# Altium PCB MRF49XAmboard.OLD.PcbDoc
Units mm, origin at the board's own origin, x right, y up, seen from the top; angles counter-clockwise.
Board outline 20.81 x 30 mm, 2 copper layers (Top Layer, Bottom Layer); 14 components, 18 nets, 48 pads, 55 vias.
Unrouted connection lines stored in the file: 2.
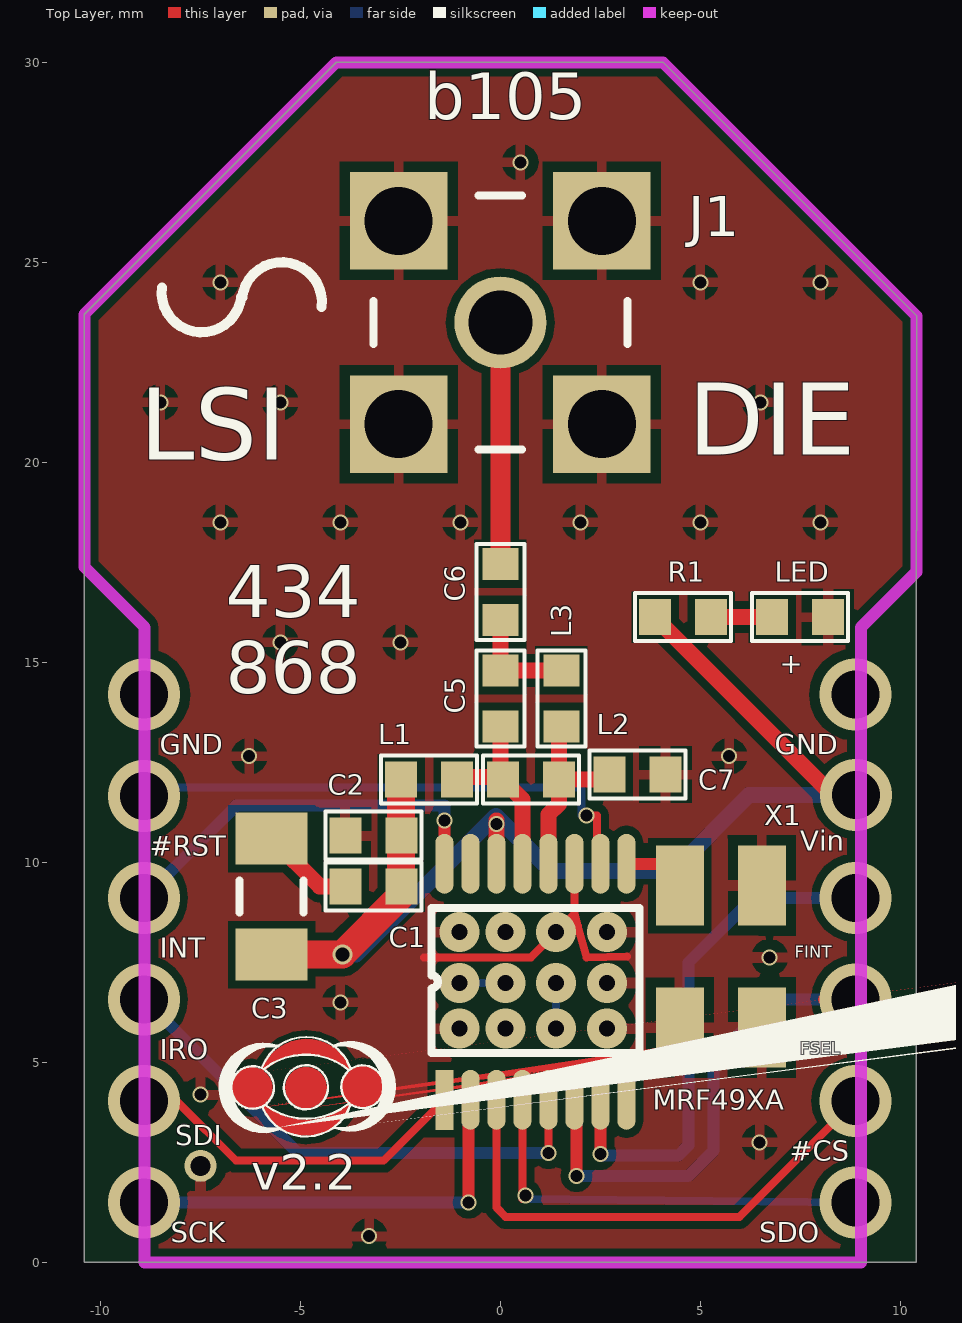
[diagram p0: Top Layer view]
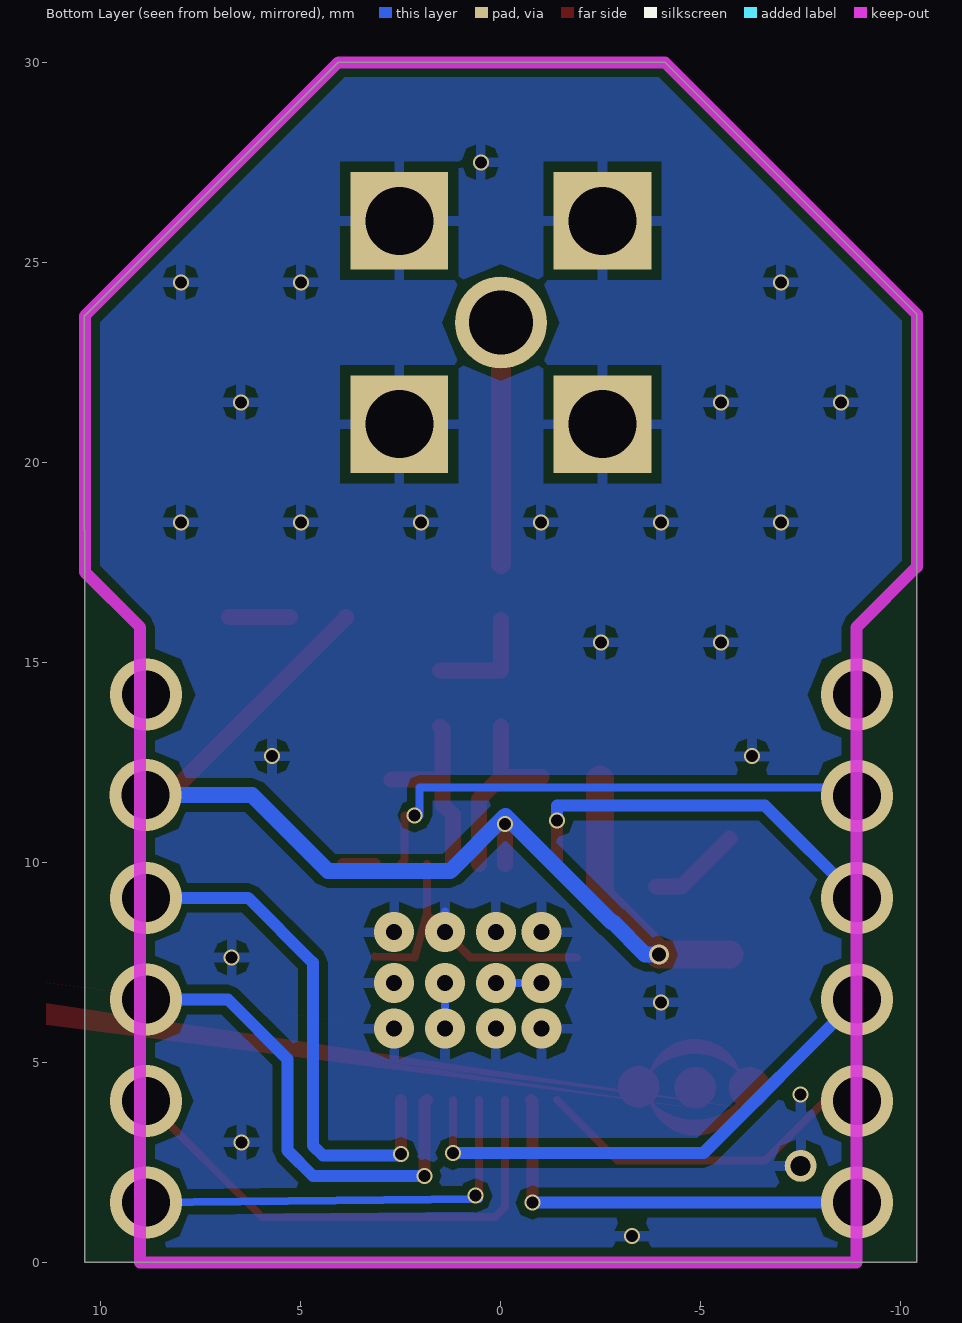
[diagram p1: Bottom Layer view, seen from below]
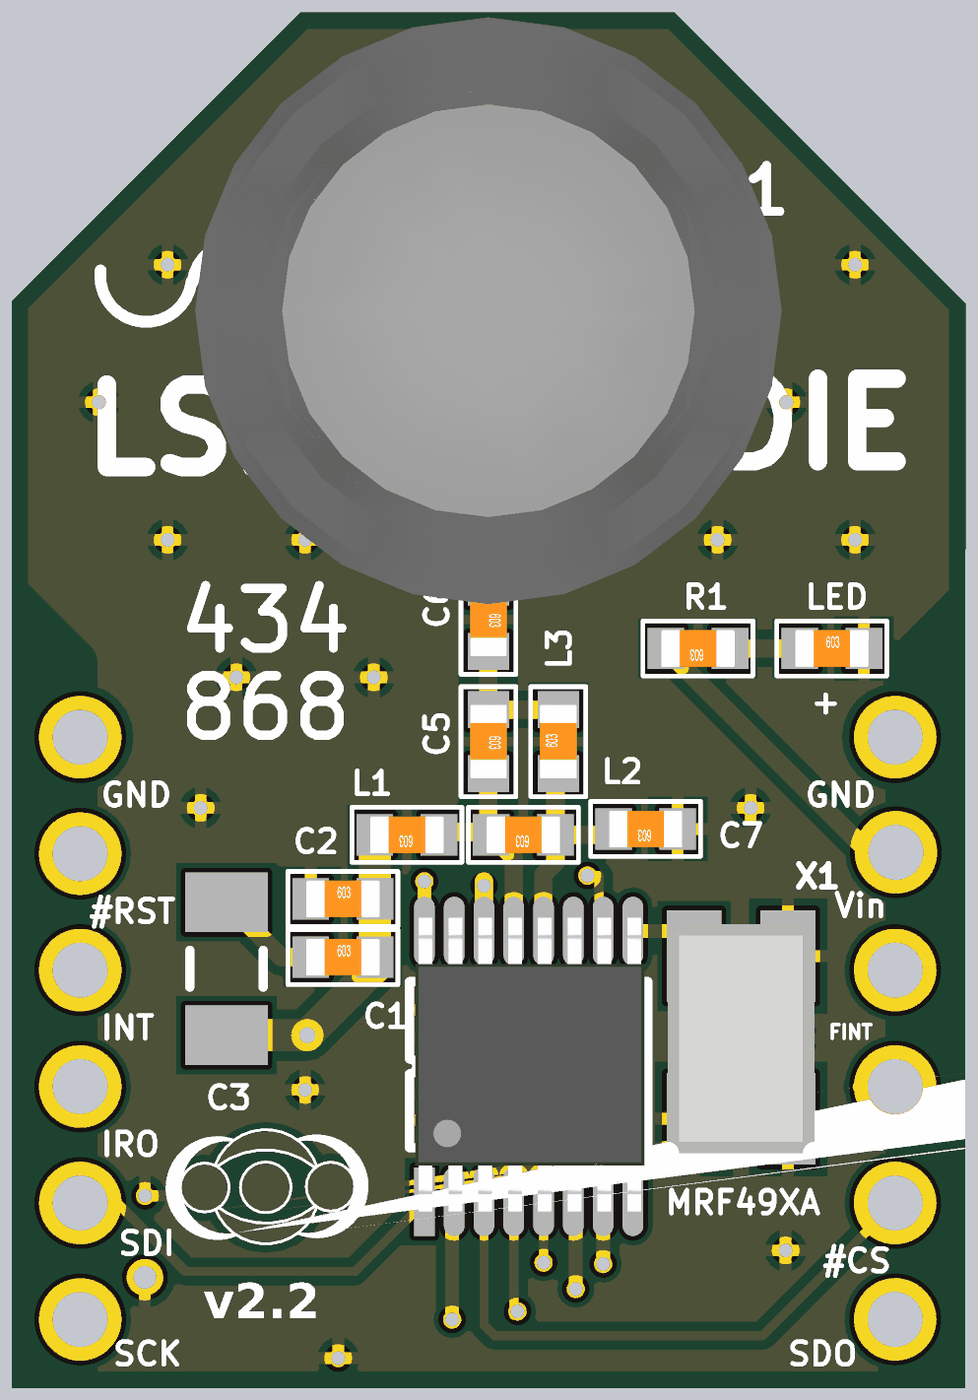
[diagram p2: 3D render of the assembled board from above, using the file's embedded part models]

## Layer stack, top to bottom
Top Solder: solder mask 0.0102, Solder Resist, Dk 3.5
Top Layer: signal copper 0.0356
Dielectric1: dielectric 0.32, FR-4, Dk 4.8
Bottom Layer: signal copper 0.0356
Bottom Solder: solder mask 0.0102, Solder Resist, Dk 3.5

## Board outline
-10.4,0 -10.4,23.7 -4.1,30 4.064,30 10.414,23.65 10.414,18.288 10.4,18.302 10.4,0

## Design rules (kind name [scope] priority, off if disabled: settings)
Clearance [All] p1: gap=0.2
Height [All] p1: minheight=0 maxheight=100 prefheight=12.7
HoleSize [All] p1: absolutevalues=TRUE maxlimit=1.7 minlimit=0.3 maxpercent=80.000 minpercent=20.000
MinimumAnnularRing [All] p1: minimumring=0.05
MinimumSolderMaskSliver [All] p1: minsoldermaskwidth=0.06
PolygonConnect [All] p1: connectstyle=Relief reliefconductorwidth=0.254 reliefentries=4 polygonreliefangle="90 Angle" airgapwidth=0.254
RoutingVias [All] p1: holewidth=0.4 width=1 viastyle="Through Hole" minholewidth=0.15 minwidth=0.4 maxholewidth=1.2 maxwidth=1.9
SilkToSilkClearance [All] p1: silktosilkclearance=0.15
SilkToSolderMaskClearance SilkscreenOverComponentPads [IsPad] p1: minsilkscreentomaskgap=0.04 clearancetoexposedcopper=TRUE
SolderMaskExpansion [All] p1: expansion=0.102
UnpouredPolygon [All] p1: allowunpoured=FALSE
Width Width_VCC [InNet('VCC')] p1: maxlimit=1 minlimit=0.3 preferedwidth=0.4 minimp=50.000000 maximp=50.000000 favimp=50.000000
Width [All] p2: maxlimit=1 minlimit=0.2 preferedwidth=0.2 minimp=50.000000 maximp=50.000000 favimp=50.000000
24 further rules are at their usual default settings.

## Components (designator, comment, footprint, x,y, rotation, side; value= is the part's Value field where it differs from the comment)
C1 "Cap" "1608[0603] - SERIGRAFIADO" -3.175,9.398 r0 top
C2 "Cap" "1608[0603] - Serigrafiado" -3.175,10.668 r0 top
C3 "Cap" CAPC3216N -5.715,9.144 r270 top
C5 "Cap" "1608[0603] - serigrafiado" 0,14.097 r270 top
C6 "Cap" "1608[0603] - serigrafiado" 0,16.764 r270 top
C7 "Cap" "1608[0603] - serigrafiado" 3.429,12.192 r180 top
J1 "SMA 50OHM PCB launcher" "SMA PCB LAUNCHER" 0,23.495 r90 top
L1 "L" "1608[0603] - serigrafiado" -1.778,12.065 r180 top
L2 "L" "1608[0603] - serigrafiado" 0.762,12.065 r180 top
L3 "L" "1608[0603] - serigrafiado" 1.524,14.097 r90 top
LED "LED_SMD_Hg" "1608[0603] - SERIGRAFIADO" 7.493,16.129 r0 top
MRF49XA "MRF49XA" MRF49XA -1.397,4.064 r90 top
R1 "Res1" "1608[0603] - SERIGRAFIADO" 4.572,16.129 r180 top
X1 "XTAL" "XTC CRYSTAL" 5.461,7.62 r0 top

## Footprints (in the part's own frame and the unit in brackets; to place one, negate y for a bottom-side part, rotate by r counter-clockwise, add the part's x,y. Pads: shape width x height; smd on the part's side, far side on the other; paste and mask are expansions set on the pad)
"1608[0603] - SERIGRAFIADO" [mm] "Chip Capacitor, Body 1.6x0.8mm, IPC High Density, Serigrafía en el borde"
  rect 0.8x0.9 smd: 1(-0.7,0) 2(0.7,0)
  silkscreen extent -1.2,-0.6 1.2,0.6, body extent -0.8,-0.4 0.8,0.4, height 0.3
"1608[0603] - Serigrafiado" [mm] "Chip Capacitor, Body 1.6x0.8mm, IPC High Density, Serigrafía en el borde"
  rect 0.8x0.9 smd: 1(-0.7,0) 2(0.7,0)
  silkscreen extent -1.2,-0.6 1.2,0.6, body extent -0.8,-0.4 0.8,0.4, height 0.3
"1608[0603] - serigrafiado" [mm] "Chip Capacitor, Body 1.6x0.8mm, IPC High Density, Serigrafía en el borde"
  rect 0.8x0.9 smd: 1(-0.7,0) 2(0.7,0)
  silkscreen extent -1.2,-0.6 1.2,0.6, body extent -0.8,-0.4 0.8,0.4, height 0.3
CAPC3216N [mm] "Chip Capacitor, Body 3.2x1.6mm, IPC Medium Density"
  rect 1.3x1.8 smd: 1(-1.45,0) 2(1.45,0)
  silkscreen extent -0.4,-0.8 0.4,0.8, body extent -1.7,-0.9 1.7,0.9, height 1.35
MRF49XA [mm]
  rect 1.5x0.45 smd: 1(0,0)
  oval 1.5x0.45 smd: 2(0,-0.65) 3(0,-1.3) 4(0,-1.95) 5(0,-2.6) 6(0,-3.25) 7(0,-3.9) 8(0,-4.55) 9(5.9,-4.55) 10(5.9,-3.9) 11(5.9,-3.25) 12(5.9,-2.6) 13(5.9,-1.95) 14(5.9,-1.3) 15(5.9,-0.65) 16(5.9,0)
  silkscreen extent 1.17,-4.88 4.8,0.33, body extent -0.21,-4.8 6.19,0.2, height 1.1
"SMA PCB LAUNCHER" [mm]
  round 2.3 hole 1.6: 1(0,0)
  rect 2.44x2.44 hole 1.7: 2(-2.54,-2.54) 3(2.54,-2.54) 4(2.54,2.54) 5(-2.54,2.54)
  silkscreen extent -3.17,-3.17 3.17,3.17, body extent -6.4,-6.4 6.4,6.4, height 55.88
"XTC CRYSTAL" [mm] "10 MHz 10 ppm 10pF"
  rect 1.2x2 smd: 1(-0.975,1.8) 2(-0.975,-1.75) 3(1.075,-1.75) 4(1.075,1.8)
  body extent -1.55,-2.5 1.65,2.5, height 0.9

## Part data
C1 C2 C3 C5 C6 C7: "Capacitor"
J1: "SMA RF Coaxial PCB Connector, SM, Vertical Mount Socket, 50 Ohm Impedance"
L1 L2 L3: "Inductor"
LED: "Typical BLUE SiC LED"
MRF49XA: "Sub-GHz RF transceiver supporting the 433/868/915MHz ISM frequency band"
R1: "Resistor"
X1: "Crystal Oscillator"

## Free pads (board coordinates)
  round 0.8 hole 0.5: ""(-7.495,2.413)

## Via types
v1: diameter 0.4, hole 0.3, Top Layer to Bottom Layer, 30 vias
v2: diameter 1.8, hole 1.2, Top Layer to Bottom Layer, 12 vias
v3: diameter 1, hole 0.4, Top Layer to Bottom Layer, 12 vias
v4: diameter 0.5, hole 0.35, Top Layer to Bottom Layer, 1 vias

## Nets (pads, with @x,y where several pads share a name; then routed paths per layer and width w, separated by ;. In a path a pad name is that pad's centre, name@x,y a point inside that pad or via, vN(x,y) a via of type N, cw(c..) or ccw(c..) an arc to the next point about the centre after c; other vN are vias at no path point)
CS: MRF49XA.3 | length 13.3
  Top Layer w0.2: MRF49XA.3 -0.097,1.367 0.132,1.138 5.978,1.138 v2(8.874,4.034)
  Bottom Layer w0.2: v2(8.874,4.034) v2@9.218,4.034
FINT: MRF49XA.7 | length 13.3
  Top Layer w0.3: v1(2.503,2.704) MRF49XA.7 ; v2@8.874,8.935 v2(8.874,9.114)
  Bottom Layer w0.3: v1(2.503,2.704) 2.54,2.667 4.445,2.667 4.699,2.921 4.699,7.493 6.32,9.114 v2(8.874,9.114)
FSEL: MRF49XA.6 | length 12.8
  Top Layer w0.3: MRF49XA.6 1.905,4.012 v1(1.905,2.159) ; v2@8.098,6.574 v2(8.874,6.574)
  Bottom Layer w0.3: v1(1.905,2.159) 1.91,2.154 4.694,2.154 5.334,2.794 5.334,5.08 6.828,6.574 v2(8.874,6.574)
GND: C2.1 C7.1 J1.2 J1.3 J1.4 J1.5 LED.2 MRF49XA.11 pad. X1.2 X1.3 X1.4 | length 10.4
  Top Layer w0.2: -1.905,7.62 0.762,7.62 v3(1.397,8.255) 1.853,8.711 ; MRF49XA.11 1.853,8.711 ; 3.161,7.646 2.159,7.62 1.938,8.407 1.853,8.711
  Bottom Layer w0.2: v3(-1.016,6.985) v3(0.127,6.985) ; v3(1.397,5.842) v3(1.397,6.985) ; v3(1.397,8.255) 1.397,8.771
  other v1: -3.278,0.652 6.484,3 -7.493,4.191 -4,6.5 6.731,7.62 -6.278,12.652 5.722,12.652 -5.5,15.5 -2.5,15.5 -7,18.5 -4,18.5 -1,18.5 2,18.5 5,18.5 8,18.5 -8.5,21.5 -5.5,21.5 6.5,21.5 -7,24.5 5,24.5 8,24.5 0.5,27.5
  other v2: -8.906,14.194 8.874,14.194
  other v3: -1.016,5.842 0.127,5.842 2.667,5.842 2.667,6.985 -1.016,8.255 0.127,8.255 2.667,8.255
INT: MRF49XA.16 | length 9.9
  Top Layer w0.3: MRF49XA.16 v1(-1.397,11.049)
  Bottom Layer w0.3: v2(-8.906,9.114) -6.604,11.416 -1.397,11.416 v1(-1.397,11.049)
IRQ: MRF49XA.5 | length 13.3
  Top Layer w0.2: MRF49XA.5 v1(1.203,2.734) v1@1.27,2.667
  Top Layer w0.3: v2@-8.906,6.366 v2(-8.906,6.574)
  Bottom Layer w0.3: v2(-8.906,6.574) -5.066,2.734 v1(1.203,2.734)
NetC1_1: C1.1 C3.1 | length 2.3
  Top Layer w0.4: C3.1 -4.519,9.398 C1.1
NetC5_1: C5.1 C6.2 L3.2 | length 2.8
  Top Layer w0.4: C6.2 C5.1 L3.2
NetC6_1: C6.1 J1.1 | length 6
  Top Layer w0.5: C6.1 J1.1
NetLED_1: LED.1 R1.1 | length 1.5
  Top Layer w0.4: R1.1 LED.1
RESET: MRF49XA.10 | length 13.3
  Top Layer w0.2: v1(2.159,11.176) 2.413,11.176 2.413,10.054 MRF49XA.10
  Bottom Layer w0.2: v2(-8.906,11.654) -8.694,11.866 2.032,11.866 2.032,11.176 v1(2.159,11.176)
RF_NEG: C5.2 L1.1 L2.2 MRF49XA.13 | length 4.6
  Top Layer w0.4: L1.1@-1.016,12.127 0,12.127 C5.2 ; L2.2 0.553,11.574 MRF49XA.13
RF_POS: C7.2 L2.1 L3.1 MRF49XA.12 | length 4.8
  Top Layer w0.4: MRF49XA.12 1.203,11.196 1.462,11.455 L2.1 ; L3.1 1.462,13.335 L2.1 ; C7.2@2.729,12.065 L2.1
SCK: MRF49XA.2 | length 10.7
  Top Layer w0.3: v1(-0.792,1.494) -0.792,4.019 MRF49XA.2
  Bottom Layer w0.3: v2(-8.906,1.494) v1(-0.792,1.494)
SDI: MRF49XA.1 | length 8.8
  Top Layer w0.2: v2(-8.904,4.034) -8.098,4.034 -6.604,2.54 -2.921,2.54 MRF49XA.1
SDO: MRF49XA.4 | length 11
  Top Layer w0.2: MRF49XA.4 0.553,1.588 v1(0.635,1.67)
  Bottom Layer w0.2: v1(0.635,1.67) 0.553,1.588 v2(8.874,1.496)
VCC: C1.2 C2.2 C3.2 L1.2 MRF49XA.14 R1.2 | length 30.3
  Top Layer w0.4: MRF49XA.14 v1@-0.097,11.049 ; R1.2 3.872,16.113 8.301,11.684 v2(8.89,11.684)
  Top Layer w0.7: C3.2 v4(-3.951,7.694) -2.478,9.167 L1.2
  Bottom Layer w0.4: v4(-3.951,7.694) -3.609,7.694 -2.794,8.509 -2.764,8.509 -0.112,11.161 1.27,9.779 4.318,9.779 6.223,11.684 v2(8.89,11.684)
  other v1: -0.097,10.952
XTAL: MRF49XA.9 X1.1 | length 0.8
  Top Layer w0.3: MRF49XA.9 X1.1@3.942,9.964
pads on no net: MRF49XA.8 MRF49XA.15
copper on no net: | length 10.4
  Top Layer w0.059: -5.945,4.789 cw(c-4.85,4.394) -3.771,4.83 ; -5.943,3.919 ccw(c-4.864,4.355) -3.769,3.961 ; -5.941,4.785 cw(c-4.843,3.686) -3.78,4.82 ; -5.91,3.948 ccw(c-4.848,5.082) -3.749,3.983

## Polygon pours and split planes (outlines as drawn)
GND on Top Layer "GND" (solid, remove dead copper, pour order 15): -10.692,8.763 -10.597,-0.135 -5.829,-0.645 -0.748,-0.645 0,-0.508 11.016,-0.249 10.679,24.119 4.445,30.353 -4.064,30.353 -10.692,24.066
GND on Top Layer "GND" (solid, pour order 10): 3.683,4.826 3.81,4.953 3.81,10.541 7.366,10.541 7.493,10.668 7.493,4.826 3.683,4.826
GND on Top Layer "GND" (solid, remove dead copper, pour order 7): 3.624,4.869 3.624,10.703 3.564,10.763 3.743,10.584 7.18,10.584 7.18,4.996 7.053,4.869 3.624,4.869
GND on Bottom Layer "GND" (solid, remove dead copper, pour order 13): -11.176,24.003 -11.176,-0.508 -10.16,-0.508 10.922,-0.508 10.922,2.413 10.922,24.003 4.699,30.226 4.699,30.48 -4.064,30.48

## Keep-outs
Keep-Out Layer:
  lines w0.25: -10.4,17.775 -10.4,17.385 -8.89,15.875 -8.89,0
  lines w0.3: -10.4,17.385 -8.89,15.875 -8.89,0 9.017,0 9.017,15.875 10.4,17.258 10.4,17.748 10.4,23.664 4.064,30 -4.1,30 -10.4,23.7 -10.4,17.775 -10.4,17.385

## Other copper
Top Layer:
  region: -6.218,3.845 cw(c-6.218,4.362) -6.735,4.362 cw(c-6.218,4.362) -6.218,4.879 cw(c-6.218,4.362) -5.701,4.362 cw(c-6.218,4.362) -6.218,3.845 ccw(c18.299,7.517)
  region: -4.859,3.85 cw(c-4.859,4.367) -5.376,4.367 cw(c-4.859,4.367) -4.859,4.883 cw(c-4.859,4.367) -4.342,4.367 cw(c-4.859,4.367) -4.859,3.85 ccw(c19.657,7.522)
  region: -3.439,3.872 cw(c-3.439,4.389) -3.956,4.389 cw(c-3.439,4.389) -3.439,4.905 cw(c-3.439,4.389) -2.922,4.389 cw(c-3.439,4.389)
  region: -5.964,4.766 ccw(c-5.941,4.785) -5.921,4.764 cw(c-4.843,3.686) -3.801,4.799 ccw(c-3.78,4.82) -3.755,4.806 ccw(c-3.771,4.83) -3.741,4.83 ccw(c-3.771,4.83) -3.744,4.841 ccw(c-4.85,4.394) -5.972,4.799 ccw(c-5.945,4.789) -5.964,4.766 ccw(c18.575,7.94)
  region: -5.97,3.908 ccw(c-4.864,4.355) -3.742,3.948 ccw(c-4.848,5.082) -3.728,3.962 ccw(c-3.749,3.983) -3.72,3.983 ccw(c-3.749,3.983) -3.77,4.003 cw(c-4.848,5.082) -5.89,3.969 ccw(c-5.91,3.948) -5.939,3.948 ccw(c-5.943,3.919) -5.97,3.908 ccw(c19.653,7.51)

## Silkscreen, mask and mechanical layers (free items; w line width, h text height)
Top Overlay:
  region: -5.527,3.379 cw(c-5.692,4.374) -5.561,5.375 ccw(c-5.557,5.404) -5.527,5.404 ccw(c-5.557,5.404) -5.553,5.433 ccw(c-5.692,4.374) -5.567,5.435 ccw(c-5.586,5.412) -5.577,5.44 ccw(c-5.912,4.36) -5.488,3.312 ccw(c-5.499,3.339) -5.47,3.339 ccw(c-5.499,3.339) -5.5,3.369 ccw(c-5.522,3.35) -5.527,3.379 cw(c18.824,7.529)
  region: -4.162,3.34 cw(c-4.156,3.369) -4.179,3.386 cw(c-4.153,3.374) -4.142,3.401 ccw(c-3.748,4.397) -4.12,3.392 ccw(c-3.955,4.388) -2.946,4.388 ccw(c-3.955,4.388) -4.16,5.376 cw(c-4.166,5.405) -4.195,5.398 cw(c-4.17,5.414) -4.181,5.442 cw(c-3.748,4.397) -2.617,4.397 cw(c-3.748,4.397) -4.135,3.335 cw(c-3.955,4.388) -4.162,3.34 ccw(c20.361,6.524)
  lines w0.059: -5.958,4.87 cw(c-4.858,4.46) -3.753,4.858 ; -5.941,3.866 ccw(c-4.858,4.319) -3.746,3.942 ; -5.917,4.832 cw(c-4.867,3.482) -3.788,4.809 ; -5.881,3.934 ccw(c-4.856,5.304) -3.806,3.953 ; -5.659,4.4 ccw(c-6.192,4.372) -5.658,4.376 ; -5.586,5.412 ccw(c-5.912,4.36) -5.499,3.339 ; -5.557,5.404 ccw(c-5.692,4.374) -5.522,3.35 ; -4.307,4.404 ccw(c-4.859,4.376) -4.306,4.38 ; -4.17,5.414 cw(c-3.748,4.397) -4.153,3.374 ; -4.166,5.405 cw(c-3.955,4.388) -4.156,3.369 ; -2.909,4.418 ccw(c-3.442,4.39) -2.908,4.394
  lines w0.254: -8.462,24.374 ccw(c-7.47,24.252) -6.477,24.13 ; -6.454,24.125 cw(c-5.461,24.003) -4.468,23.881
  text "b105" at -1.905,28.194 h2
  text "DIE" at 4.699,20.193 h1.8
  text "LSI" at -9.017,20.066 h1.8
  text "434" at -6.858,16.129 h1.3
  text "+" at 6.985,14.732 h0.5
  text "868" at -6.858,14.224 h1.3
  text "GND" at -8.509,12.7 h0.5
  text "GND" at 6.858,12.7 h0.5
  text "Vin" at 7.493,10.287 h0.5
  text "#RST" at -8.763,10.16 h0.5
  text "INT" at -8.509,7.62 h0.5
  text "FINT" at 7.366,7.62 h0.3
  text "FSEL" at 7.493,5.207 h0.3
  text "IRO" at -8.509,5.08 h0.5
  text "SDI" at -8.128,2.921 h0.5
  text "#CS" at 7.239,2.54 h0.5
  text "v2.2" at -6.223,1.524 h1.5
  text "SCK" at -8.245,0.508 h0.5
  text "SDO" at 6.477,0.508 h0.5